# Altium PCB Sim7600.PcbDoc
Units mm, origin at the board's own origin, x right, y up, seen from the top; angles counter-clockwise.
Board outline 50 x 25 mm, 2 copper layers (Top Layer, Bottom Layer), stack 1.071 mm thick; 118 components, 92 nets, 620 pads, 0 vias.
Unrouted connection lines stored in the file: 334.
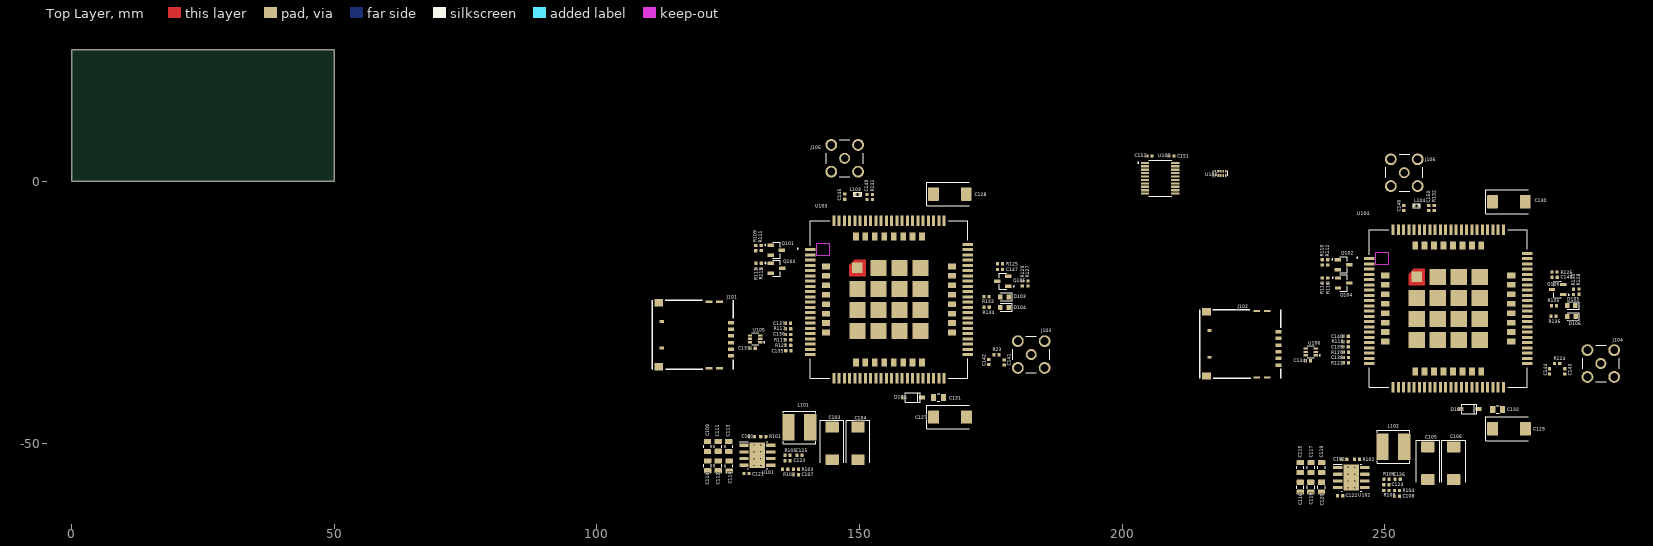
[diagram p0: Top Layer view]
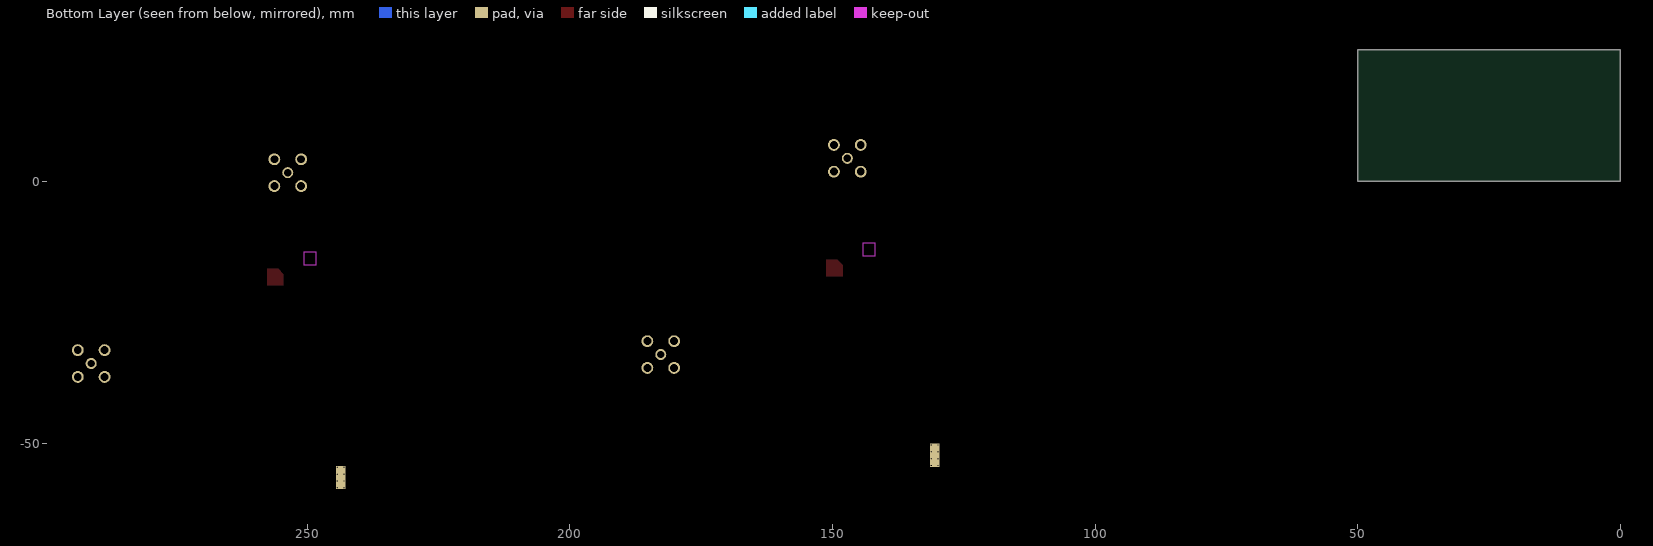
[diagram p1: Bottom Layer view, seen from below]

## Layer stack, top to bottom
Top Solder: solder mask 0.0102, Solder Resist, Dk 3.5
Top Layer: signal copper 0.0356
Dielectric 1: dielectric 1, FR-4, Dk 4.8
Bottom Layer: signal copper 0.0356
Bottom Solder: solder mask 0.0102, Solder Resist, Dk 3.5

## Board outline
0,0 0,25 50,25 50,0

## Design rules (kind name [scope] priority, off if disabled: settings)
Clearance [All] p1: gap=0.35 except(0.25: Arc-Arc Arc-Track Arc-SMDPad Arc-THPad Arc-Via Track-Track Track-SMDPad Track-THPad Track-Via SMDPad-SMDPad SMDPad-THPad SMDPad-Via THPad-THPad THPad-Via Via-Via)
Height [All] p1: minheight=0 maxheight=50 prefheight=12.7
HoleSize [All] p1: absolutevalues=TRUE maxlimit=10 minlimit=0.025 maxpercent=80.000 minpercent=20.000
HoleToHoleClearance [All] p1: gap=0 allowstackedmicrovias=TRUE
PolygonConnect PolygonConnect_1 [HasFootprint('RF_Shield_36903205S')] p1: connectstyle=Relief reliefconductorwidth=0.254 reliefentries=4 polygonreliefangle="90 Angle" airgapwidth=0.254
PolygonConnect [All] p2: connectstyle=Direct reliefconductorwidth=0.254 reliefentries=4 polygonreliefangle="90 Angle" airgapwidth=0.254
RoutingVias [All] p1: holewidth=0.3 width=0.6 viastyle="Through Hole" minholewidth=0.3 minwidth=0.5 maxholewidth=5 maxwidth=10
SolderMaskExpansion [All] p1: expansion=0.102
Width [All] p1: maxlimit=5 minlimit=0.2 preferedwidth=0.4
27 further rules are at their usual default settings.

## Components (designator, comment, footprint, x,y, rotation, side; value= is the part's Value field where it differs from the comment)
C101 "0.1uF" C_0402_1005Metric 129.475,-48.655 r180 top
C102 "0.1uF" C_0402_1005Metric 242.315,-52.975 r180 top
C103 "100uF" CP_EIA-7343-31_Kemet-D 144.783,-49.937 r270 top
C104 "100uF" CP_EIA-7343-31_Kemet-D 149.706,-49.937 r270 top
C105 "100uF" CP_EIA-7343-31_Kemet-D 258.253,-53.708 r270 top
C106 "100uF" CP_EIA-7343-31_Kemet-D 263.161,-53.708 r270 top
C107 "NC" C_0402_1005Metric 137.93,-55.9 r180 top
C108 "NC" C_0402_1005Metric 252.384,-59.978 r180 top
C109 "10uF" C_0805_2012Metric 121.056,-50.534 r90 top
C110 "10uF" C_0805_2012Metric 121.076,-54.217 r270 top
C111 "10uF" C_0805_2012Metric 123.088,-50.51 r90 top
C112 "10uF" C_0805_2012Metric 123.089,-54.205 r270 top
C113 "10uF" C_0805_2012Metric 125.105,-50.533 r90 top
C114 "10uF" C_0805_2012Metric 125.168,-54.254 r270 top
C115 "10uF" C_0805_2012Metric 233.946,-54.539 r90 top
C116 "10uF" C_0805_2012Metric 233.946,-58.285 r270 top
C117 "10uF" C_0805_2012Metric 235.988,-54.53 r90 top
C118 "10uF" C_0805_2012Metric 235.972,-58.279 r270 top
C119 "10uF" C_0805_2012Metric 238.011,-54.53 r90 top
C120 "10uF" C_0805_2012Metric 237.98,-58.284 r270 top
C121 "0.1uF" C_0402_1005Metric 128.465,-55.667 r0 top
C122 "0.1uF" C_0402_1005Metric 241.558,-59.927 r0 top
C123 "NC" C_0402_1005Metric 136.317,-53.243 r0 top
C124 "NC" C_0402_1005Metric 250.339,-57.823 r0 top
C125 "1.2nF" C_0402_1005Metric 138.551,-52.223 r0 top
C126 "1.2nF" C_0402_1005Metric 252.507,-56.754 r0 top
C127 "100uF" CP_EIA-7343-31_Kemet-D 167.238,-44.927 r0 top
C128 "100uF" CP_EIA-7343-31_Kemet-D 167.222,-2.464 r0 top
C129 "100uF" CP_EIA-7343-31_Kemet-D 273.699,-47.175 r0 top
C130 "100uF" CP_EIA-7343-31_Kemet-D 273.687,-3.909 r0 top
C131 "10uF" C_0805_2012Metric 165.065,-41.211 r0 top
C132 "10uF" C_0805_2012Metric 271.537,-43.481 r0 top
C133 "0.1uF" C_0402_1005Metric 129.658,-31.839 r0 top
C134 "0.1uF" C_0402_1005Metric 235.43,-34.225 r0 top
C135 "33pF" C_0402_1005Metric 136.443,-32.295 r0 top
C136 "33pF" C_0402_1005Metric 136.423,-29.191 r0 top
C137 "33pF" C_0402_1005Metric 136.409,-27.092 r0 top
C138 "33pF" C_0402_1005Metric 242.626,-33.581 r0 top
C139 "33pF" C_0402_1005Metric 242.606,-31.564 r0 top
C140 "33pF" C_0402_1005Metric 242.604,-29.541 r0 top
C141 "NC" C_0402_1005Metric 177.542,-34.525 r90 top
C142 "NC" C_0402_1005Metric 174.641,-34.427 r90 top
C143 "NC" C_0402_1005Metric 284.33,-36.218 r90 top
C144 "NC" C_0402_1005Metric 281.418,-36.218 r90 top
C145 "33pF" C_0402_1005Metric 147.186,-2.969 r90 top
C146 "33pF" C_0402_1005Metric 253.634,-5.13 r90 top
C147 "0.1uF" C_0402_1005Metric 176.775,-16.82 r180 top
C148 "0.1uF" C_0402_1005Metric 282.396,-18.334 r180 top
C149 "33pF" C_0402_1005Metric 151.424,-3.016 r90 top
C150 "33pF" C_0402_1005Metric 258.426,-5.133 r90 top
C151 "0.1uF" C_0402_1005Metric 209.384,4.792 r180 top
C152 "0.1uF" C_0402_1005Metric 205.234,4.792 r180 top
D101 "MMSZ5231BT1G" SOD-123 160.157,-41.184 r180 top
D102 "MMSZ5231BT1G" SOD-123 266.165,-43.405 r180 top
D103 "SML-D12U1WT86" LED_0603_1608Metric 177.61,-22.029 r180 top
D104 "SML-D12U1WT86" LED_0603_1608Metric 177.612,-24.024 r180 top
D105 "SML-D12U1WT86" LED_0603_1608Metric 285.566,-23.695 r180 top
D106 "SML-D12U1WT86" LED_0603_1608Metric 285.594,-25.763 r180 top
J101 "78646-3001" 78646-3001 118.535,-29.332 r180 top
J102 "78646-3001" 78646-3001 222.846,-31.089 r180 top
J103 "CONREVSMA002-G" LINX_CONREVSMA002-G 182.707,-33.023 r90 top
J104 "CONREVSMA002-G" LINX_CONREVSMA002-G 291.185,-34.731 r90 top
J105 "CONREVSMA002-G" LINX_CONREVSMA002-G 147.176,4.354 r180 top
J106 "CONREVSMA002-G" LINX_CONREVSMA002-G 253.752,1.613 r180 top
L101 "SRN6045TA-3R3Y" L_Bourns_SRN6045TA 138.55,-46.885 r0 top
L102 "SRN6045TA-3R3Y" L_Bourns_SRN6045TA 251.696,-50.579 r0 top
L103 "47nH" SMD_R(0402) 149.646,-2.503 r180 top
L104 "47nH" SMD_R(0402) 256.089,-4.64 r180 top
Q101 "BC847CLT1G" SOT23-3 134.166,-13.16 r0 top
Q102 "BC847CLT1G" SOT23-3 242.174,-15.916 r0 top
Q103 "BC847CLT1G" SOT23-3 134.194,-16.588 r0 top
Q104 "BC847CLT1G" SOT23-3 242.193,-19.391 r0 top
Q105 "BC847CLT1G" SOT23-3 177.314,-19.056 r180 top
Q106 "BC847CLT1G" SOT23-3 282.946,-20.641 r180 top
R23 "0R" R_0402_1005Metric 176.099,-33.044 r180 top
R101 "10R" R_0402_1005Metric 131.688,-48.645 r180 top
R102 "10R" R_0402_1005Metric 244.761,-52.967 r180 top
R103 "75k" R_0402_1005Metric 137.932,-54.869 r180 top
R104 "75k" R_0402_1005Metric 252.376,-58.913 r180 top
R105 "15k" R_0402_1005Metric 136.312,-52.218 r0 top
R106 "15k" R_0402_1005Metric 250.344,-56.746 r0 top
R107 "20k" R_0402_1005Metric 135.86,-54.865 r180 top
R108 "20k" R_0402_1005Metric 250.334,-58.913 r180 top
R109 "4.7k" R_0402_1005Metric 130.218,-12.768 r270 top
R110 "4.7k" R_0402_1005Metric 238.129,-15.445 r270 top
R111 "47k" R_0402_1005Metric 131.295,-12.754 r90 top (schematic designator R11)
R112 "47k" R_0402_1005Metric 239.171,-15.446 r90 top
R113 "4.7k" R_0402_1005Metric 130.281,-16.118 r270 top
R114 "4.7k" R_0402_1005Metric 238.136,-18.908 r270 top
R115 "47k" R_0402_1005Metric 131.313,-16.113 r90 top (schematic designator R15)
R116 "47k" R_0402_1005Metric 239.182,-18.893 r90 top
R117 "22R" R_0402_1005Metric 136.421,-28.117 r180 top
R118 "22R" R_0402_1005Metric 242.6,-30.557 r180 top
R119 "22R" R_0402_1005Metric 136.414,-30.23 r180 top
R120 "22R" R_0402_1005Metric 242.622,-32.566 r180 top
R121 "22R" R_0402_1005Metric 136.429,-31.277 r180 top
R122 "22R" R_0402_1005Metric 242.626,-34.592 r180 top
R124 "0R" R_0402_1005Metric 282.873,-34.735 r180 top
R125 "4.7k" R_0402_1005Metric 176.786,-15.753 r180 top
R126 "4.7k" R_0402_1005Metric 282.384,-17.299 r180 top
R127 "4.7k" R_0402_1005Metric 182.1,-19.511 r270 top
R128 "4.7k" R_0402_1005Metric 287.036,-21.057 r270 top
R129 "47k" R_0402_1005Metric 181.015,-19.505 r270 top
R130 "47k" R_0402_1005Metric 285.99,-21.066 r270 top
R131 "10R" R_0402_1005Metric 152.471,-3.016 r90 top
R132 "10R" R_0402_1005Metric 259.479,-5.12 r90 top
R133 "51R" R_0402_1005Metric 174.208,-22.019 r0 top
R134 "51R" R_0402_1005Metric 174.232,-24.002 r0 top
R135 "51R" R_0402_1005Metric 282.254,-23.74 r0 top
R136 "51R" R_0402_1005Metric 282.172,-25.752 r0 top
U101 "AP64501SP-13" SOIC-8-1EP_3.9x4.9mm_P1.27mm_EP2.95x4.9mm_Mask2.71x3.4mm_ThermalVias 130.551,-52.197 r0 top
U102 "AP64501SP-13" SOIC-8-1EP_3.9x4.9mm_P1.27mm_EP2.95x4.9mm_Mask2.71x3.4mm_ThermalVias 243.672,-56.456 r0 top
U103 "SIM7600G" IC_SIM7600G 155.616,-22.532 r0 top
U104 "SIM7600G" IC_SIM7600G 262.128,-24.247 r0 top
U105 "SMF05CT1G" SOT-363 130.142,-30.023 r180 top
U106 "SMF05CT1G" SOT-363 235.942,-32.51 r180 top
U107 "TXS0108EPWR" SOP65P640X120-20N 207.264,0.555 r0 top
U108 "TPD4EUSB30DQAR" USON-10_2.5x1.0mm_P0.5mm 218.78,1.498 r90 top

## Footprints (in the part's own frame and the unit in brackets; to place one, negate y for a bottom-side part, rotate by r counter-clockwise, add the part's x,y. Pads: shape width x height; smd on the part's side, far side on the other; paste and mask are expansions set on the pad)
78646-3001 [mm]
  rect 1.7x1.4 smd: 7(6.762,-6.189) 8(6.762,6.021)
  rect 0.8x0.54 smd: 9(6.182,-2.619) 10(6.182,2.461)
  rect 1.3x0.45 smd: 11(-4.808,-6.349) 12(-2.808,-6.349) 13(-4.808,6.301) 14(-2.808,6.301)
  rect 1.15x0.65 smd: C1(-6.968,2.676) C2(-6.968,0.136) C3(-6.968,-2.404) C5(-6.968,3.946) C6(-6.968,1.406) C7(-6.968,-1.134)
  silkscreen extent -7.4,-6.6 8.05,6.45, body extent -7.42,-6.7 8.03,6.35, height 1.81
C_0402_1005Metric [mm]
  rrect25% 0.59x0.64 smd mask+0: 1(-0.485,0) 2(0.485,0)
C_0805_2012Metric [mm]
  rrect25% 0.975x1.4 smd mask+0: 1(-0.937,0) 2(0.937,0)
  silkscreen extent -0.26,-0.71 0.26,0.71
CP_EIA-7343-31_Kemet-D [mm]
  rrect12% 2.075x2.55 smd mask+0: 1(-3.113,0) 2(3.113,0)
  silkscreen extent -4.41,-2.26 3.65,2.26
IC_SIM7600G [mm]
  rect 2x0.6 smd paste-2: 1(-15,9.5) 2(-15,8.5) 3(-15,7.5) 4(-15,6.5) 5(-15,5.5) 6(-15,4.5) 7(-15,3.5) 8(-15,2.5) 9(-15,1.5) 10(-15,0.5) 11(-15,-0.5) 12(-15,-1.5) 13(-15,-2.5) 14(-15,-3.5) 15(-15,-4.5) 16(-15,-5.5) 17(-15,-6.5) 18(-15,-7.5) 19(-15,-8.5) 20(-15,-9.5) 41(15,-9.5) 42(15,-8.5) 43(15,-7.5) 44(15,-6.5) 45(15,-5.5) 46(15,-4.5) 47(15,-3.5) 48(15,-2.5) 49(15,-1.5) 50(15,-0.5) 51(15,0.5) 52(15,1.5) 53(15,2.5) 54(15,3.5) 55(15,4.5) 56(15,5.5) 57(15,6.5) 58(15,7.5) 59(15,8.5) 60(15,9.5) 81(-15,-10.5) 82(15,-10.5) 85(15,10.5)
  rect 0.6x2 smd paste-2: 21(-9.5,-15) 22(-8.5,-15) 23(-7.5,-15) 24(-6.5,-15) 25(-5.5,-15) 26(-4.5,-15) 27(-3.5,-15) 28(-2.5,-15) 29(-1.5,-15) 30(-0.5,-15) 31(0.5,-15) 32(1.5,-15) 33(2.5,-15) 34(3.5,-15) 35(4.5,-15) 36(5.5,-15) 37(6.5,-15) 38(7.5,-15) 39(8.5,-15) 40(9.5,-15) 61(9.5,15) 62(8.5,15) 63(7.5,15) 64(6.5,15) 65(5.5,15) 66(4.5,15) 67(3.5,15) 68(2.5,15) 69(1.5,15) 70(0.5,15) 71(-0.5,15) 72(-1.5,15) 73(-2.5,15) 74(-3.5,15) 75(-4.5,15) 76(-5.5,15) 77(-6.5,15) 78(-7.5,15) 79(-8.5,15) 80(-9.5,15) 83(10.5,-15) 84(-10.5,-15) 86(-10.5,15) 87(10.5,15)
  rect 1.6x1.1 smd paste-2: 88(-12,6.3) 89(-12,4.5) 90(-12,2.7) 91(-12,0.9) 92(-12,-0.9) 93(-12,-2.7) 94(-12,-4.5) 95(-12,-6.3) 104(12,-6.3) 105(12,-4.5) 106(12,-2.7) 107(12,-0.9) 108(12,0.9) 109(12,2.7) 110(12,4.5) 111(12,6.3)
  rect 1.1x1.6 smd paste-2: 96(-6.3,-12) 97(-4.5,-12) 98(-2.7,-12) 99(-0.9,-12) 100(0.9,-12) 101(2.7,-12) 102(4.5,-12) 103(6.3,-12) 112(6.3,12) 113(4.5,12) 114(2.7,12) 115(0.9,12) 116(-0.9,12) 117(-2.7,12) 118(-4.5,12) 119(-6.3,12)
  rect 2x2 smd paste-2 mask+0: 120(-6,6)
  rect 3.1x3.1 smd paste-3: 121(-2,6) 122(2,6) 123(6,6) 124(-6,2) 125(-2,2) 126(2,2) 127(6,2) 128(-6,-2) 129(-2,-2) 130(2,-2) 131(6,-2) 132(-6,-6) 133(-2,-6) 134(2,-6) 135(6,-6)
  Top Layer region: -4.45,4.45 -7.55,4.45 -7.55,6.55 -6.55,7.55 -4.45,7.55
  Keep-Out Layer region: -11.4,8.3 -13.8,8.3 -13.8,10.7 -11.4,10.7
  Keep-Out Layer region: -11.4,8.3 -13.8,8.3 -13.8,10.7 -11.4,10.7
  silkscreen extent -17.45,-15 15,15
L_Bourns_SRN6045TA [mm]
  rect 2.35x5.1 smd mask+0: 1(-2.075,0) 2(2.075,0)
  silkscreen extent -3.1,-3.1 3.1,3.1
LED_0603_1608Metric [mm]
  rrect25% 0.875x0.95 smd mask+0: 1(-0.787,0) 2(0.787,0)
  silkscreen extent -1.49,-0.73 0.8,0.73
LINX_CONREVSMA002-G [mm]
  round 2.1 hole 1.4: 1(0,0)
  round 2.25 hole 1.5: 2(-2.55,-2.55) 2(-2.55,2.55) 2(2.55,-2.55) 2(2.55,2.55)
  silkscreen extent -3.5,-3.5 3.5,3.5, body extent -3.48,-11.71 3.52,3.49, height 10
R_0402_1005Metric [mm]
  rrect25% 0.59x0.64 smd mask+0: 1(-0.485,0) 2(0.485,0)
SMD_R(0402) [mm]
  rect 0.45x0.6 smd: 1(-0.432,0) 2(0.432,0)
  silkscreen extent -0.73,-0.38 0.73,0.39, body extent -0.51,-0.25 0.49,0.25, height 0.37
SOD-123 [mm]
  rect 1.12x0.8 smd: A(1.73,0) K(-1.73,0)
  silkscreen extent -1.42,-0.9 1.42,0.9, body extent -1.87,-0.8 1.83,0.8, height 1.27
SOIC-8-1EP_3.9x4.9mm_P1.27mm_EP2.95x4.9mm_Mask2.71x3.4mm_ThermalVias [mm]
  rrect25% 1.775x0.6 smd mask+0: 1(-2.562,1.905) 2(-2.562,0.635) 3(-2.562,-0.635) 4(-2.562,-1.905) 5(2.562,-1.905) 6(2.562,-0.635) 7(2.562,0.635) 8(2.562,1.905)
  round 0.5 hole 0.25 paste-0.5 mask-0.5: 9(-0.65,-1.95) 9(-0.65,-0.65) 9(-0.65,0.65) 9(-0.65,1.95) 9(0.65,0.65) 9(0.65,1.95) 9(0.65,-1.95) 9(0.65,-0.65)
  rect 2.95x4.9 smd paste-4.9 mask-4.9: 9(0,0)
  rect 1.8x4.4 smd far side paste-4.4 mask+0.1: 9(0,0)
  rrect50% 1.13x1.42 on Top Paste mask-1.42: Un1(0.68,-0.85) Un3(0.68,0.85) Un4(-0.68,-0.85) Un5(-0.68,0.85)
  rect 2.71x3.4 on Top Solder paste-3.4 mask-3.4: Un2(0,0)
  silkscreen extent -3.45,-2.56 1.95,2.56
SOP65P640X120-20N [mm]
  rrect25% 1.57x0.41 smd: 1(-2.87,2.925) 2(-2.87,2.275) 3(-2.87,1.625) 4(-2.87,0.975) 5(-2.87,0.325) 6(-2.87,-0.325) 7(-2.87,-0.975) 8(-2.87,-1.625) 9(-2.87,-2.275) 10(-2.87,-2.925) 11(2.87,-2.925) 12(2.87,-2.275) 13(2.87,-1.625) 14(2.87,-0.975) 15(2.87,-0.325) 16(2.87,0.325) 17(2.87,0.975) 18(2.87,1.625) 19(2.87,2.275) 20(2.87,2.925)
  silkscreen extent -4.29,-3.45 2.2,3.45, body extent -3.15,-3.24 3.25,3.26, height 1.2
SOT23-3 [mm]
  rect 1.23x0.59 smd: 1(-1.06,0.95) 2(-1.06,-0.95) 3(1.06,0)
  silkscreen extent -2.2,-1.56 0.7,1.56, body extent -1.2,-1.45 1.1,1.45, height 1.1
SOT-363 [mm]
  rect 0.8x0.41 smd: 1(-0.97,0.65) 2(-0.97,0) 3(-0.97,-0.65) 4(0.97,-0.65) 5(0.97,0) 6(0.97,0.65)
  silkscreen extent -1.85,-1.17 0.68,1.17, body extent -1.05,-1 1.05,1, height 1.1
USON-10_2.5x1.0mm_P0.5mm [mm]
  rect 0.55x0.3 smd mask+0: 1(-0.385,1) 2(-0.385,0.5) 4(-0.385,-0.5) 5(-0.385,-1) 6(0.385,-1) 7(0.385,-0.5) 9(0.385,0.5) 10(0.385,1)
  rect 0.55x0.4 smd mask+0: 3(-0.385,0) 8(0.385,0)
  silkscreen extent -0.8,-1.4 0.5,1.4

## Part data
C101 C102 C121 C122 C133 C134 C147 C148 C151 C152: library part Cap, "0.1µF ±10% 25V"
C103 C104 C105 C106 C127 C128 C129 C130: library part "Cap Pol1"
C107 C108 C123 C124 C135 C136 C137 C138 C139 C140 C145 C146 C149 C150: library part Cap
C109 C110 C111 C112 C113 C114 C115 C116 C117 C118 C119 C120 C131 C132: library part Cap, "10µF ±10% 25V"
C125 C126 C141 C142 C143 C144: library part Cap, "1.2µF ±5% 25V"
D101 D102: library part "Diode 10TQ035", "Schottky Rectifier"
D103 D104 D105 D106: library part LED1, "Typical RED GaAs LED"
J101 J102: library part "CN SimCard_63", "CN SimCard_63"
J103 J104 J105 J106: library part SMA-SMD, "CONN SMA JACK STR EDGE MNT"
L101 L102 L103 L104: library part Inductor
Q101 Q102 Q103 Q104 Q105 Q106: library part 2N3904, "TRANS NPN 45V 100MA SOT23-3"
R23 R103 R104 R105 R106 R107 R108 R124 R133 R134 R135 R136: library part "Res Semi"
R101 R102 R131 R132: library part "Res Semi", "10 Ohms ±1% 0.1W"
R109 R110 R113 R114 R125 R126 R127 R128: library part "Res Semi", "4.7 kOhms ±1% 0.1W"
R111 R112 R115 R116 R129 R130: library part "Res Semi", "47 kOhms ±1% 0.1W"
R117 R118 R119 R120 R121 R122: library part "Res Semi", "22 Ohms ±1% 0.1W"
U101 U102: "DCDC CONV HV BUCK SO-8EP"
U103 U104: "LTE Cat-4 Module"
U105 U106: "12.5V Clamp 8A _8/20µs_ Ipp Tvs Diode Surface Mount SC-88/SC70-6/SOT-363"
U107: "8-Bit Bidirectional Voltage-Level Shifter For Open-Drain And Push-Pull Application"
U108: "TVS DIODE 5.5V 8V 10USON"

## Nets (pads, with @x,y where several pads share a name; then routed paths per layer and width w, separated by ;. In a path a pad name is that pad's centre, name@x,y a point inside that pad or via, vN(x,y) a via of type N, cw(c..) or ccw(c..) an arc to the next point about the centre after c; other vN are vias at no path point)
+3.3V: C151.2 R131.1 R132.1 U107.19
+12V: C109.1 C110.1 C111.1 C112.1 C113.1 C114.1 C115.1 C116.1 C117.1 C118.1 C119.1 C120.1 U101.2 U101.3 U102.2 U102.3
CTS_1: U107.17
CTS_2: U107.13
FLIGHTMODE_1: R127.1
FLIGHTMODE_2: R128.1
GND: C103.2 C104.2 C105.2 C106.2 C109.2 C110.2 C111.2 C112.2 C113.2 C114.2 C115.2 C116.2 C117.2 C118.2 C119.2 C120.2 C121.2 C122.2 C123.2 C124.2 C125.2 C126.2 C127.2 C128.2 C129.2 C130.2 C131.2 C132.2 C133.2 C134.2 C135.1 C136.1 C137.1 C138.1 C139.1 C140.1 C141.1 C142.1 C143.1 C144.1 C147.1 C148.1 C149.1 C150.1 C151.1 C152.2 D101.A D102.A D103.1 D104.1 D105.1 D106.1 J101.C5 J102.C5 J103.2 J104.2 J105.2 J106.2 Q101.2 Q102.2 Q103.2 Q104.2 Q105.2 Q106.2 R107.2 R108.2 R111.1 R112.1 R115.1 R116.1 R129.1 R130.1 U101.7 U101.9 U102.7 U102.9 U103.1 U103.2 U103.5 U103.10 U103.14 U103.37 U103.40 U103.41 U103.43 U103.57 U103.58 U103.60 U103.61 U103.64 U103.65 U103.77 U103.78 U103.80 U103.81 U103.93 U103.98 U103.110 U103.118 U103.120 U103.121 U103.122 U103.123 U103.124 U103.125 U103.126 U103.127 U103.128 U103.129 U103.130 U103.131 U103.132 U103.133 U103.134 U103.135 U104.1 U104.2 U104.5 U104.10 U104.14 U104.37 U104.40 U104.41 U104.43 U104.57 U104.58 U104.60 U104.61 U104.64 U104.65 U104.77 U104.78 U104.80 U104.81 U104.93 U104.98 U104.110 U104.118 U104.120 U104.121 U104.122 U104.123 U104.124 U104.125 U104.126 U104.127 U104.128 U104.129 U104.130 U104.131 U104.132 U104.133 U104.134 U104.135 U105.2 U106.2 U107.11 U108.3 U108.8
HD3_N: U103.12 U108.1 U108.10
HD3_P: U103.13 U108.2 U108.9
HD4_N: U104.12 U108.4 U108.7
HD4_P: U104.13 U108.5 U108.6
LTE_CTS_1: U103.67 U107.5
LTE_CTS_2: U104.67 U107.9
LTE_PWRKEY_1: R109.2
LTE_PWRKEY_2: R110.2
LTE_RESET_1: R113.2
LTE_RESET_2: R114.2
LTE_RTS_1: U103.66 U107.4
LTE_RTS_2: U104.66 U107.8
LTE_RXD_1: U103.68 U107.1
LTE_RXD_2: U104.68 U107.6
LTE_TXD_1: U103.71 U107.3
LTE_TXD_2: U104.71 U107.7
NET_LED_1: R133.1 U103.51
NET_LED_2: R135.1 U104.51
NetC101_1: C101.1 R101.2
NetC101_2: C101.2 U101.1
NetC102_1: C102.1 R102.2
NetC102_2: C102.2 U102.1
NetC107_2: C107.2 R103.2 R107.1 U101.5
NetC108_2: C108.2 R104.2 R108.1 U102.5
NetC121_1: C121.1 U101.4
NetC122_1: C122.1 U102.4
NetC123_1: C123.1 R105.1 U101.6
NetC124_1: C124.1 R106.1 U102.6
NetC125_1: C125.1 R105.2
NetC126_1: C126.1 R106.2
NetC133_1: C133.1 J101.C1 U103.20 U105.6
NetC134_1: C134.1 J102.C1 U104.20 U106.6
NetC135_2: C135.2 R121.1 U103.19
NetC136_2: C136.2 R119.1 U103.18
NetC137_2: C137.2 R117.1 U103.17
NetC138_2: C138.2 R122.1 U104.19
NetC139_2: C139.2 R120.1 U104.18
NetC140_2: C140.2 R118.1 U104.17
NetC141_2: C141.2 J103.1 R23.1
NetC142_2: C142.2 R23.2 U103.82
NetC143_2: C143.2 J104.1 R124.1
NetC144_2: C144.2 R124.2 U104.82
NetC145_1: C145.1 U103.79
NetC145_2: C145.2 J105.1 L103.2
NetC146_1: C146.1 U104.79
NetC146_2: C146.2 J106.1 L104.2
NetC147_2: C147.2 Q105.3 R125.2 U103.54
NetC148_2: C148.2 Q106.3 R126.2 U104.54
NetC149_2: C149.2 L103.1 R131.2
NetC150_2: C150.2 L104.1 R132.2
NetD103_2: D103.2 R133.2
NetD104_2: D104.2 R134.2
NetD105_2: D105.2 R135.2
NetD106_2: D106.2 R136.2
NetJ101_C2: J101.C2 R119.2 U105.3
NetJ101_C3: J101.C3 R121.2 U105.1
NetJ101_C7: J101.C7 R117.2 U105.4
NetJ102_C2: J102.C2 R120.2 U106.3
NetJ102_C3: J102.C3 R122.2 U106.1
NetJ102_C7: J102.C7 R118.2 U106.4
NetL101_1: L101.1 R101.1 U101.8
NetL102_1: L102.1 R102.1 U102.8
NetQ101_1: Q101.1 R109.1 R111.2
NetQ101_3: Q101.3 U103.3
NetQ102_1: Q102.1 R110.1 R112.2
NetQ102_3: Q102.3 U104.3
NetQ103_1: Q103.1 R113.1 R115.2
NetQ103_3: Q103.3 U103.4
NetQ104_1: Q104.1 R114.1 R116.2
NetQ104_3: Q104.3 U104.4
NetQ105_1: Q105.1 R127.2 R129.2
NetQ106_1: Q106.1 R128.2 R130.2
RTS_1: U107.16
RTS_2: U107.12
RXD_1: U107.18
RXD_2: U107.14
STATUS_1: R134.1 U103.49
STATUS_2: R136.1 U104.49
TXD_1: U107.20
TXD_2: U107.15
VBUS: U103.11 U104.11
VDD_1V8_1: C152.1 R125.1 U103.15 U107.2 U107.10
VDD_1V8_2: R126.1 U104.15
VLTE_1: C103.1 C104.1 C107.1 C127.1 C128.1 C131.1 D101.K L101.2 R103.1 U103.38 U103.39 U103.62 U103.63
VLTE_2: C105.1 C106.1 C108.1 C129.1 C130.1 C132.1 D102.K L102.2 R104.1 U104.38 U104.39 U104.62 U104.63
pads on no net: J101.7 J101.8 J101.9 J101.10 J101.11 J101.12 J101.13 J101.14 J101.C6 J102.7 J102.8 J102.9 J102.10 J102.11 J102.12 J102.13 J102.14 J102.C6 U101.Un1 U101.Un2 U101.Un3 U101.Un4 U101.Un5 U102.Un1 U102.Un2 U102.Un3 U102.Un4 U102.Un5 U103.6 U103.7 U103.8 U103.9 U103.16 U103.21 U103.22 U103.23 U103.24 U103.25 U103.26 U103.27 U103.28 U103.29 U103.30 U103.31 U103.32 U103.33 U103.34 U103.35 U103.36 U103.42 U103.44 U103.45 U103.46 U103.47 U103.48 U103.50 U103.52 U103.53 U103.55 U103.56 U103.59 U103.69 U103.70 U103.72 U103.73 U103.74 U103.75 U103.76 U103.83 U103.84 U103.85 U103.86 U103.87 U103.88 U103.89 U103.90 U103.91 U103.92 U103.94 U103.95 U103.96 U103.97 U103.99 U103.100 U103.101 U103.102 U103.103 U103.104 U103.105 U103.106 U103.107 U103.108 U103.109 U103.111 U103.112 U103.113 U103.114 U103.115 U103.116 U103.117 U103.119 U104.6 U104.7 U104.8 U104.9 U104.16 U104.21 U104.22 U104.23 U104.24 U104.25 U104.26 U104.27 U104.28 U104.29 U104.30 U104.31 U104.32 U104.33 U104.34 U104.35 U104.36 U104.42 U104.44 U104.45 U104.46 U104.47 U104.48 U104.50 U104.52 U104.53 U104.55 U104.56 U104.59 U104.69 U104.70 U104.72 U104.73 U104.74 U104.75 U104.76 U104.83 U104.84 U104.85 U104.86 U104.87 U104.88 U104.89 U104.90 U104.91 U104.92 U104.94 U104.95 U104.96 U104.97 U104.99 U104.100 U104.101 U104.102 U104.103 U104.104 U104.105 U104.106 U104.107 U104.108 U104.109 U104.111 U104.112 U104.113 U104.114 U104.115 U104.116 U104.117 U104.119 U105.5 U106.5

## Text inside footprints (layer, text, board x,y; h text height)
C101: Mechanical 6 "${REFERENCE}" at 130.671,-48.424 h0.25 r180
C102: Mechanical 6 "${REFERENCE}" at 243.511,-52.744 h0.25 r180
C103: Mechanical 6 "${REFERENCE}" at 143.872,-45.164 h1 r270
C104: Mechanical 6 "${REFERENCE}" at 148.794,-45.164 h1 r270
C105: Mechanical 6 "${REFERENCE}" at 257.341,-48.936 h1 r270
C106: Mechanical 6 "${REFERENCE}" at 262.249,-48.936 h1 r270
C107: Mechanical 6 "${REFERENCE}" at 139.126,-55.67 h0.25 r180
C108: Mechanical 6 "${REFERENCE}" at 253.58,-59.747 h0.25 r180
C109: Mechanical 6 "${REFERENCE}" at 120.595,-48.143 h0.5 r270
C110: Mechanical 6 "${REFERENCE}" at 121.537,-56.608 h0.5 r90
C111: Mechanical 6 "${REFERENCE}" at 122.627,-48.119 h0.5 r270
C112: Mechanical 6 "${REFERENCE}" at 123.55,-56.597 h0.5 r90
C113: Mechanical 6 "${REFERENCE}" at 124.644,-48.142 h0.5 r270
C114: Mechanical 6 "${REFERENCE}" at 125.629,-56.646 h0.5 r90
C115: Mechanical 6 "${REFERENCE}" at 233.485,-52.147 h0.5 r270
C116: Mechanical 6 "${REFERENCE}" at 234.407,-60.676 h0.5 r90
C117: Mechanical 6 "${REFERENCE}" at 235.527,-52.138 h0.5 r270
C118: Mechanical 6 "${REFERENCE}" at 236.433,-60.67 h0.5 r90
C119: Mechanical 6 "${REFERENCE}" at 237.55,-52.138 h0.5 r270
C120: Mechanical 6 "${REFERENCE}" at 238.441,-60.675 h0.5 r90
C121: Mechanical 6 "${REFERENCE}" at 127.27,-55.898 h0.25
C122: Mechanical 6 "${REFERENCE}" at 240.363,-60.157 h0.25
C123: Mechanical 6 "${REFERENCE}" at 135.121,-53.473 h0.25
C124: Mechanical 6 "${REFERENCE}" at 249.144,-58.053 h0.25
C125: Mechanical 6 "${REFERENCE}" at 137.355,-52.453 h0.25
C126: Mechanical 6 "${REFERENCE}" at 251.311,-56.984 h0.25
C127: Mechanical 6 "${REFERENCE}" at 162.465,-45.838 h1
C128: Mechanical 6 "${REFERENCE}" at 162.449,-3.376 h1
C129: Mechanical 6 "${REFERENCE}" at 268.927,-48.086 h1
C130: Mechanical 6 "${REFERENCE}" at 268.915,-4.821 h1
C131: Mechanical 6 "${REFERENCE}" at 167.456,-40.75 h0.5 r180
C132: Mechanical 6 "${REFERENCE}" at 273.928,-43.02 h0.5 r180
C133: Mechanical 6 "${REFERENCE}" at 128.463,-32.07 h0.25
C134: Mechanical 6 "${REFERENCE}" at 234.234,-34.455 h0.25
C135: Mechanical 6 "${REFERENCE}" at 135.247,-32.526 h0.25
C136: Mechanical 6 "${REFERENCE}" at 135.228,-29.422 h0.25
C137: Mechanical 6 "${REFERENCE}" at 135.213,-27.322 h0.25
C138: Mechanical 6 "${REFERENCE}" at 241.43,-33.811 h0.25
C139: Mechanical 6 "${REFERENCE}" at 241.411,-31.794 h0.25
C140: Mechanical 6 "${REFERENCE}" at 241.409,-29.772 h0.25
C141: Mechanical 6 "${REFERENCE}" at 177.772,-35.72 h0.25 r90
C142: Mechanical 6 "${REFERENCE}" at 174.871,-35.622 h0.25 r90
C143: Mechanical 6 "${REFERENCE}" at 284.561,-37.413 h0.25 r90
C144: Mechanical 6 "${REFERENCE}" at 281.648,-37.413 h0.25 r90
C145: Mechanical 6 "${REFERENCE}" at 147.417,-4.164 h0.25 r90
C146: Mechanical 6 "${REFERENCE}" at 253.865,-6.326 h0.25 r90
C147: Mechanical 6 "${REFERENCE}" at 177.971,-16.59 h0.25 r180
C148: Mechanical 6 "${REFERENCE}" at 283.591,-18.104 h0.25 r180
C149: Mechanical 6 "${REFERENCE}" at 151.654,-4.211 h0.25 r90
C150: Mechanical 6 "${REFERENCE}" at 258.656,-6.328 h0.25 r90
C151: Mechanical 6 "${REFERENCE}" at 210.58,5.023 h0.25 r180
C152: Mechanical 6 "${REFERENCE}" at 206.43,5.023 h0.25 r180
D103: Mechanical 6 "${REFERENCE}" at 175.701,-22.394 h0.4
D104: Mechanical 6 "${REFERENCE}" at 175.703,-24.389 h0.4
D105: Mechanical 6 "${REFERENCE}" at 283.657,-24.059 h0.4
D106: Mechanical 6 "${REFERENCE}" at 283.685,-26.128 h0.4
L101: Mechanical 6 "${REFERENCE}" at 137.639,-42.113 h1 r270
L102: Mechanical 6 "${REFERENCE}" at 250.785,-45.806 h1 r270
R23: Mechanical 6 "${REFERENCE}" at 177.295,-32.814 h0.25 r180
R101: Mechanical 6 "${REFERENCE}" at 132.884,-48.414 h0.25 r180
R102: Mechanical 6 "${REFERENCE}" at 245.957,-52.736 h0.25 r180
R103: Mechanical 6 "${REFERENCE}" at 139.128,-54.639 h0.25 r180
R104: Mechanical 6 "${REFERENCE}" at 253.572,-58.683 h0.25 r180
R105: Mechanical 6 "${REFERENCE}" at 135.117,-52.449 h0.25
R106: Mechanical 6 "${REFERENCE}" at 249.148,-56.976 h0.25
R107: Mechanical 6 "${REFERENCE}" at 137.055,-54.635 h0.25 r180
R108: Mechanical 6 "${REFERENCE}" at 251.53,-58.683 h0.25 r180
R109: Mechanical 6 "${REFERENCE}" at 129.987,-11.572 h0.25 r270
R110: Mechanical 6 "${REFERENCE}" at 237.899,-14.249 h0.25 r270
R111: Mechanical 6 "${REFERENCE}" at 131.525,-13.95 h0.25 r90
R112: Mechanical 6 "${REFERENCE}" at 239.402,-16.641 h0.25 r90
R113: Mechanical 6 "${REFERENCE}" at 130.05,-14.922 h0.25 r270
R114: Mechanical 6 "${REFERENCE}" at 237.905,-17.712 h0.25 r270
R115: Mechanical 6 "${REFERENCE}" at 131.543,-17.308 h0.25 r90
R116: Mechanical 6 "${REFERENCE}" at 239.412,-20.088 h0.25 r90
R117: Mechanical 6 "${REFERENCE}" at 137.617,-27.887 h0.25 r180
R118: Mechanical 6 "${REFERENCE}" at 243.796,-30.326 h0.25 r180
R119: Mechanical 6 "${REFERENCE}" at 137.61,-29.999 h0.25 r180
R120: Mechanical 6 "${REFERENCE}" at 243.817,-32.335 h0.25 r180
R121: Mechanical 6 "${REFERENCE}" at 137.624,-31.046 h0.25 r180
R122: Mechanical 6 "${REFERENCE}" at 243.821,-34.362 h0.25 r180
R124: Mechanical 6 "${REFERENCE}" at 284.069,-34.504 h0.25 r180
R125: Mechanical 6 "${REFERENCE}" at 177.982,-15.522 h0.25 r180
R126: Mechanical 6 "${REFERENCE}" at 283.58,-17.068 h0.25 r180
R127: Mechanical 6 "${REFERENCE}" at 181.87,-18.315 h0.25 r270
R128: Mechanical 6 "${REFERENCE}" at 286.806,-19.862 h0.25 r270
R129: Mechanical 6 "${REFERENCE}" at 180.784,-18.309 h0.25 r270
R130: Mechanical 6 "${REFERENCE}" at 285.759,-19.87 h0.25 r270
R131: Mechanical 6 "${REFERENCE}" at 152.701,-4.212 h0.25 r90
R132: Mechanical 6 "${REFERENCE}" at 259.71,-6.316 h0.25 r90
R133: Mechanical 6 "${REFERENCE}" at 173.012,-22.249 h0.25
R134: Mechanical 6 "${REFERENCE}" at 173.037,-24.232 h0.25
R135: Mechanical 6 "${REFERENCE}" at 281.059,-23.97 h0.25
R136: Mechanical 6 "${REFERENCE}" at 280.976,-25.982 h0.25
U101: Mechanical 6 "${REFERENCE}" at 125.871,-53.094 h0.98
U102: Mechanical 6 "${REFERENCE}" at 238.992,-57.352 h0.98
U108: Mechanical 6 "${REFERENCE}" at 221.423,2.017 h0.55 r180